# Altium PCB Some-2.PcbDoc
Units mil, origin at the board's own origin, x right, y up, seen from the top; angles counter-clockwise.
Board outline 1565 x 1360 mil, 2 copper layers (Top Layer, Bottom Layer); 10 components, 8 nets, 43 pads, 0 vias.
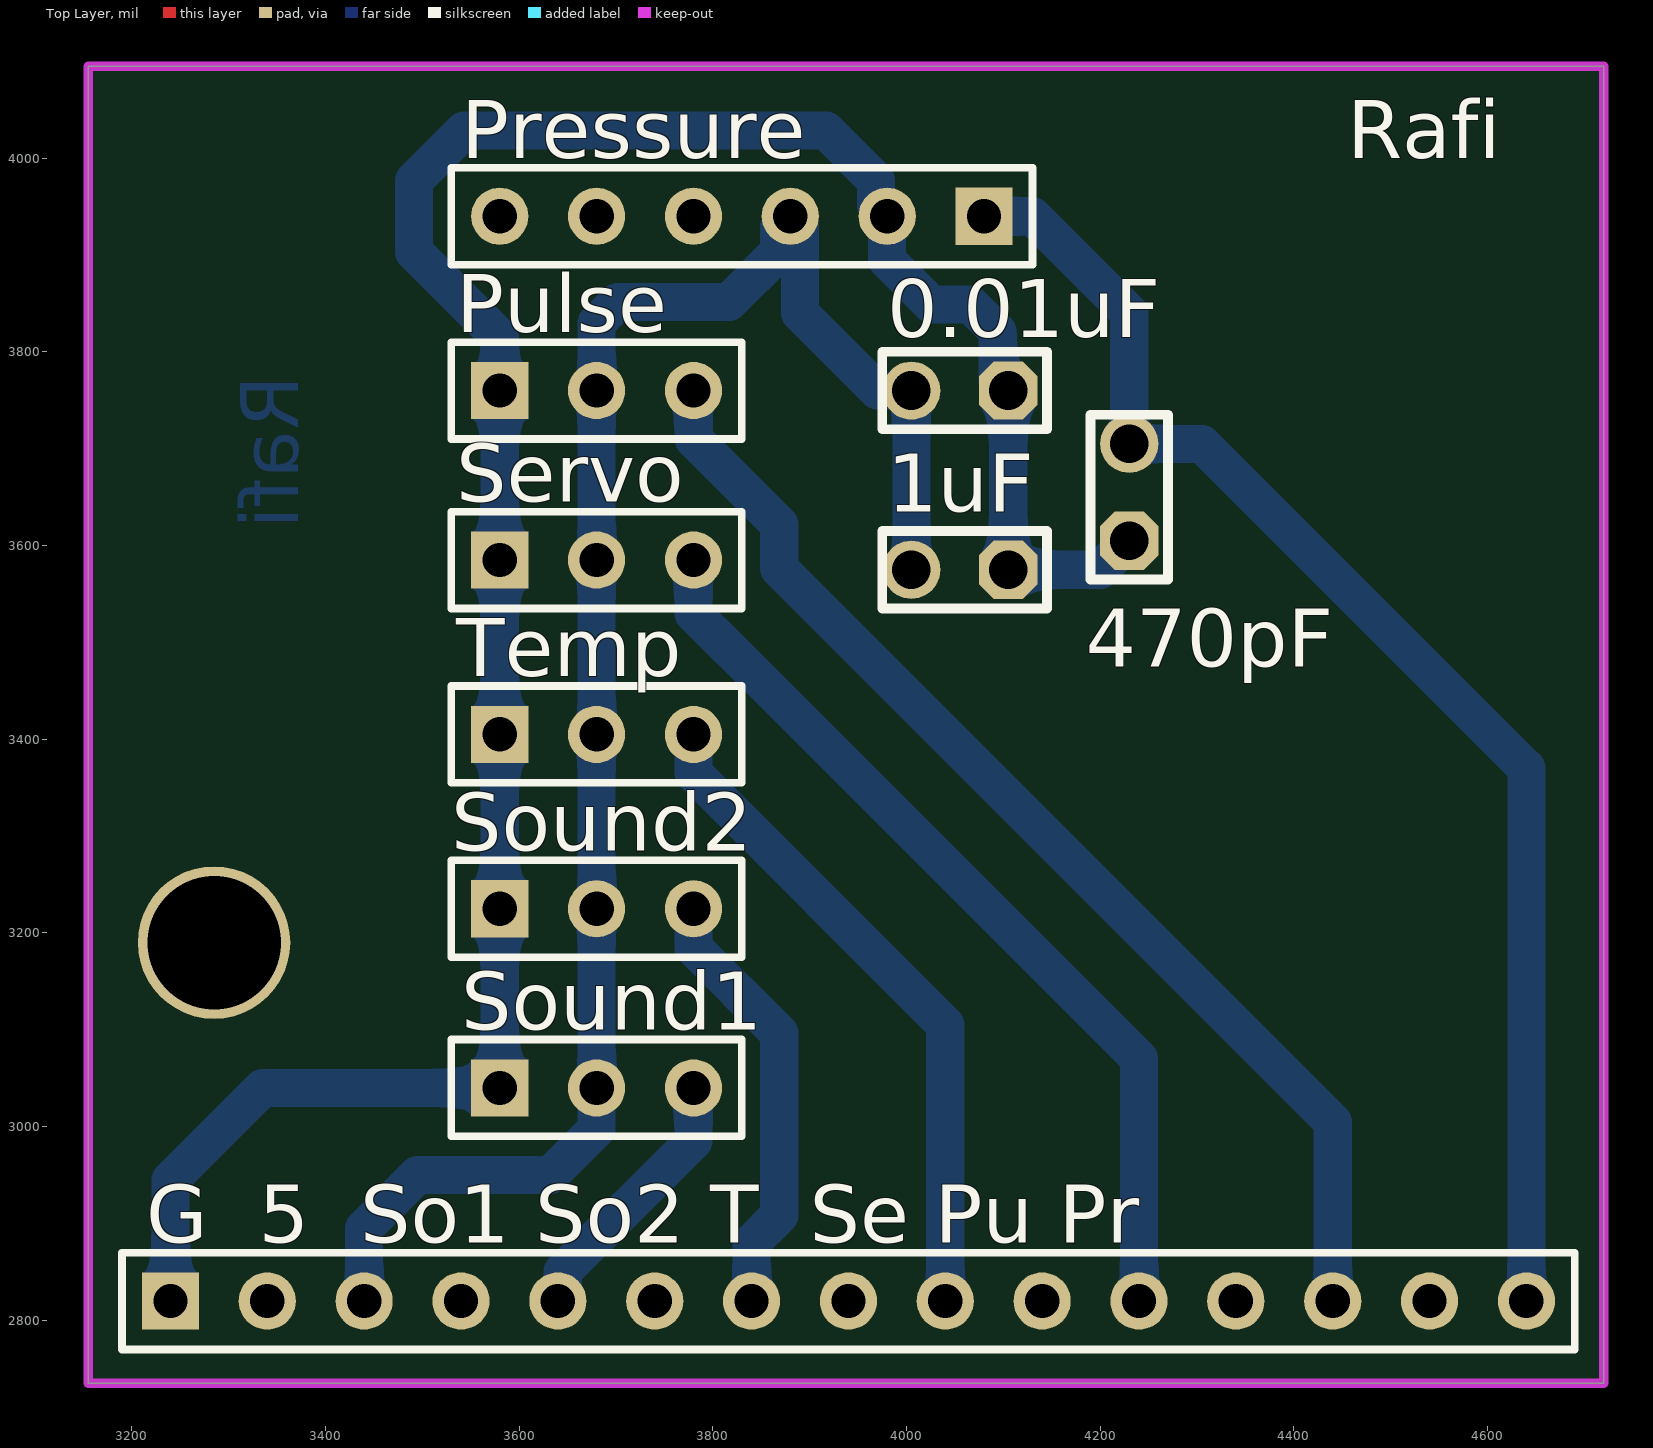
[diagram p0: Top Layer view]
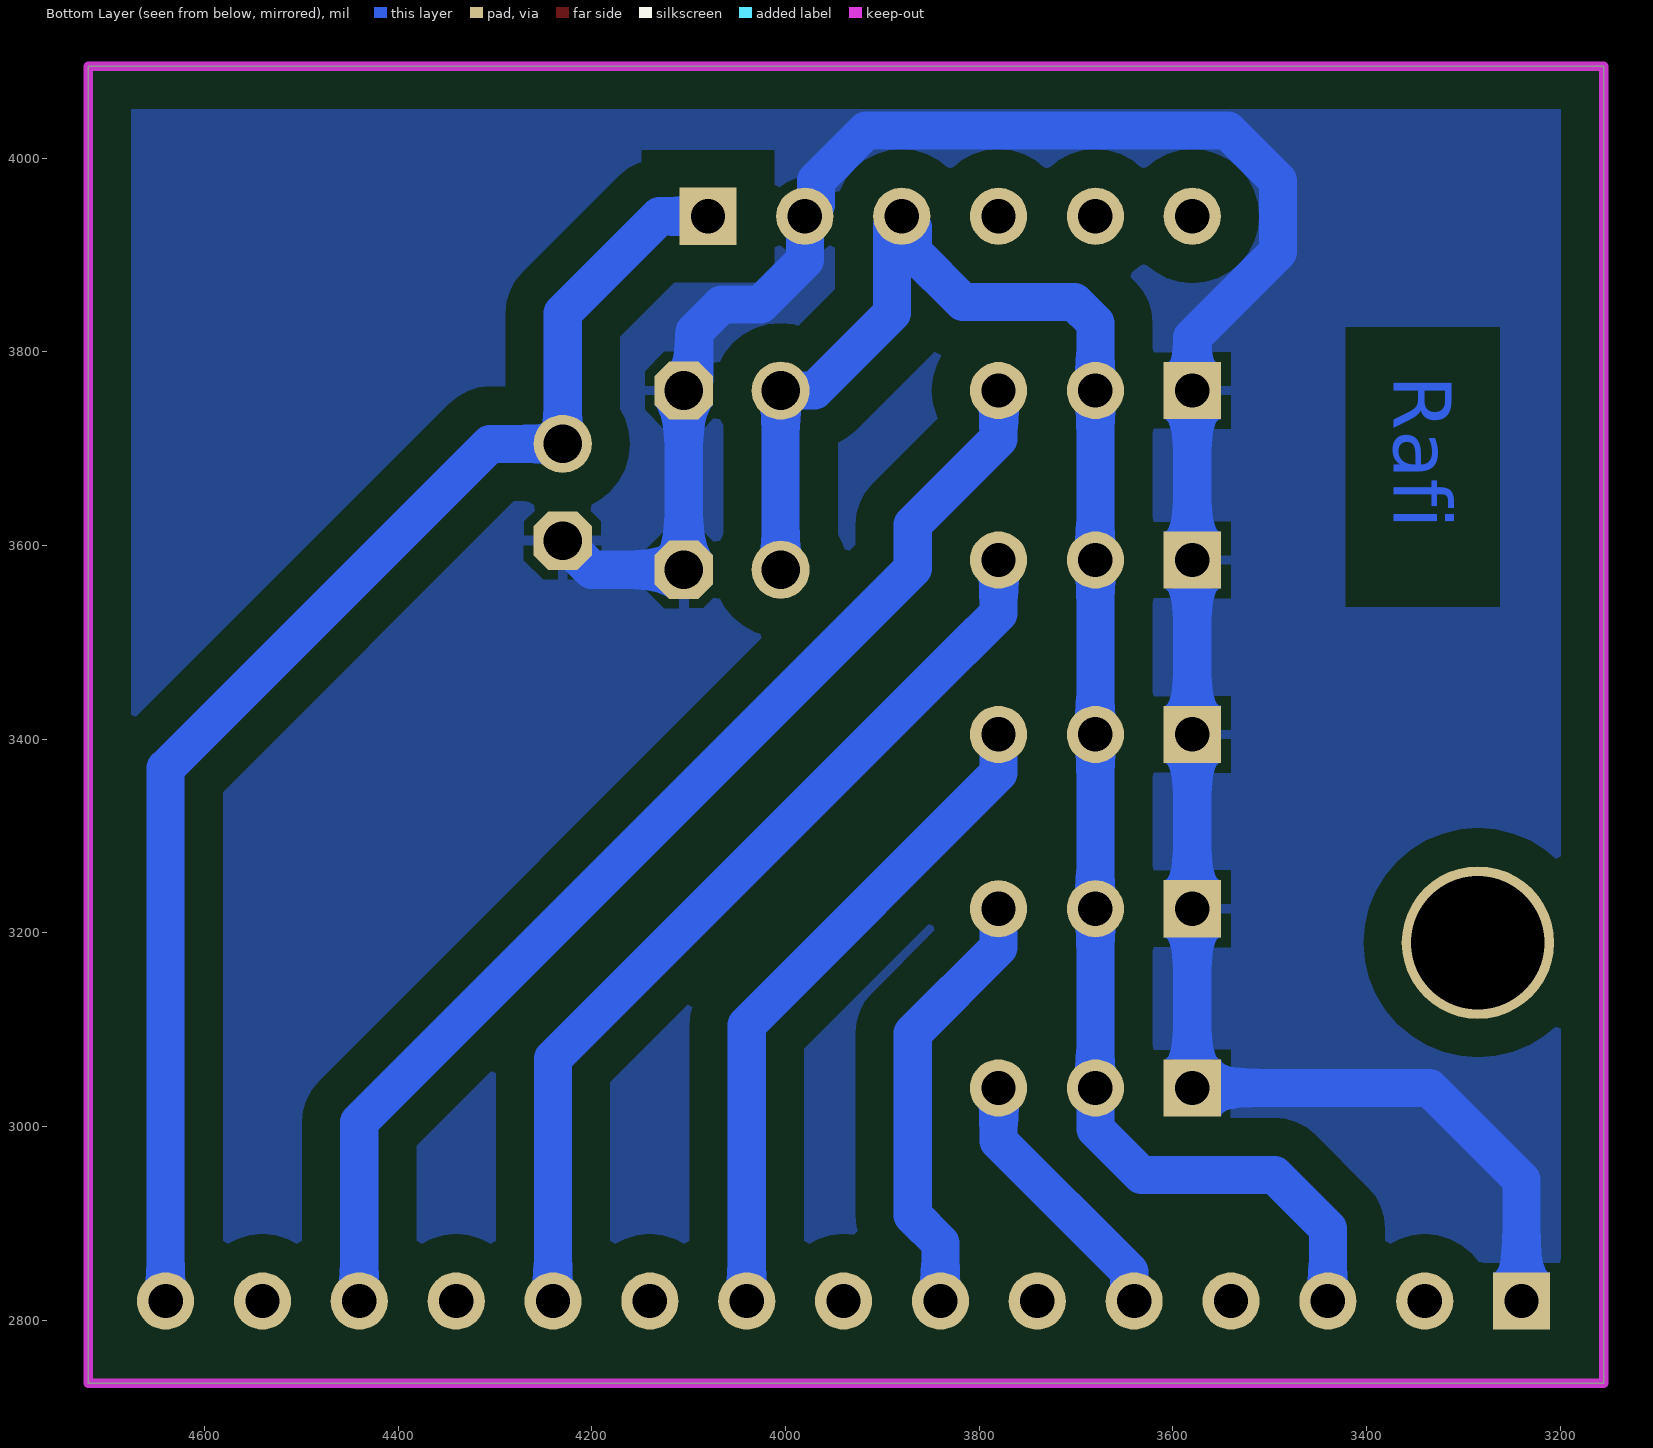
[diagram p1: Bottom Layer view, seen from below]

## Layer stack, top to bottom
Top Solder: solder mask 0.4, Solder Resist, Dk 3.5
Top Layer: signal copper 1.4
Dielectric 1: dielectric 12.6, FR-4, Dk 4.8
Bottom Layer: signal copper 1.4
Bottom Solder: solder mask 0.4, Solder Resist, Dk 3.5

## Board outline
3155,2735 3155,4095 4720,4095 4720,2735

## Design rules (kind name [scope] priority, off if disabled: settings)
Clearance [All] p1: gap=39.37
PolygonConnect [All] p1: connectstyle=Relief reliefconductorwidth=10 reliefentries=4 polygonreliefangle="90 Angle" airgapwidth=10
RoutingVias [All] p1: holewidth=28 width=50 viastyle="Through Hole" minholewidth=28 minwidth=50 maxholewidth=28 maxwidth=50
SolderMaskExpansion [All] p1: expansion=4
Width [All] p1: maxlimit=39.37 minlimit=39.37 preferedwidth=39.37
30 further rules are at their usual default settings.

## Components (designator, comment, footprint, x,y, rotation, side; value= is the part's Value field where it differs from the comment)
0.01uF "Cap" My_cap100n 4055,3760 r180 top
1uF "Cap" My_cap100n 4055,3575 r180 top
470pF "Cap" My_cap100n 4230,3655 r90 top
"G  5  So1 So2 T  Se Pu Pr" "Header 15" HDR1X15 3240,2820 r0 top (schematic designator P?)
Pressure "Header 6" HDR1X6 4080,3940 r180 top
Pulse "" HDR1X3 3580,3760 r0 top
Servo "" HDR1X3 3580,3585 r0 top
Sound1 "" HDR1X3 3580,3040 r0 top
Sound2 "" HDR1X3 3580,3225 r0 top
Temp "" HDR1X3 3580,3405 r0 top (schematic designator Temperature)

## Footprints (in the part's own frame and the unit in brackets; to place one, negate y for a bottom-side part, rotate by r counter-clockwise, add the part's x,y. Pads: shape width x height; smd on the part's side, far side on the other; paste and mask are expansions set on the pad)
HDR1X3 [mm] "Connector; Header; 3 Position"
  rect 1.5x1.5 hole 0.9: 1(0,0)
  round 1.5 hole 0.9: 2(2.54,0) 3(5.08,0)
  silkscreen extent -1.27,-1.27 6.35,1.27
HDR1X6 [mm] "Connector; Header; 6 Position"
  rect 1.5x1.5 hole 0.9: 1(0,0)
  round 1.5 hole 0.9: 2(2.54,0) 3(5.08,0) 4(7.62,0) 5(10.16,0) 6(12.7,0)
  silkscreen extent -1.27,-1.27 13.97,1.27
HDR1X15 [mm] "Connector; Header; 15 Position"
  rect 1.5x1.5 hole 0.9: 1(0,0)
  round 1.5 hole 0.9: 2(2.54,0) 3(5.08,0) 4(7.62,0) 5(10.16,0) 6(12.7,0) 7(15.24,0) 8(17.78,0) 9(20.32,0) 10(22.86,0) 11(25.4,0) 12(27.94,0) 13(30.48,0) 14(33.02,0) 15(35.56,0)
  silkscreen extent -1.27,-1.27 36.83,1.27
My_cap100n [mil]
  oct 60x60 hole 40: 1(-50,0)
  round 60 hole 40: 2(50,0)
  silkscreen extent -90,-40 80,40

## Part data
0.01uF 1uF 470pF: library part "Cap ceramic", "CAP-100Nf"
"G  5  So1 So2 T  Se Pu Pr": "Header, 15-Pin"
Pressure: "Header, 6-Pin"
Pulse Servo Sound1 Sound2 Temp: library part "Header 3", "Header, 3-Pin"

## Free pads (board coordinates)
  round 157.48 hole 137.8: 10(3285,3190)

## Nets (pads, with @x,y where several pads share a name; then routed paths per layer and width w, separated by ;. In a path a pad name is that pad's centre, name@x,y a point inside that pad or via, vN(x,y) a via of type N, cw(c..) or ccw(c..) an arc to the next point about the centre after c; other vN are vias at no path point)
+5: 0.01uF.2 1uF.2 "G  5  So1 So2 T  Se Pu Pr.3" Pressure.3 Pulse.2 Servo.2 Sound1.2 Sound2.2 Temp.2 | length 1887.4
  Bottom Layer w39.37: 3440,2820 3440,2895 3495,2950 3632.57,2950 3680,2997.43 Sound1.2 Sound2.2 Temp.2 Servo.2 Pulse.2 3680,3829.6 3701.82,3851.42 3816.69,3851.42 3868.58,3903.31 3868.58,3928.58 Pressure.3 3889.84,3930.16 3889.84,3840.16 3970,3760 0.01uF.2 1uF.2
GND: 0.01uF.1 1uF.1 470pF.1 "G  5  So1 So2 T  Se Pu Pr.1" Pressure.2 Pulse.1 Servo.1 Sound1.1 Sound2.1 Temp.1 | length 2616.9
  Bottom Layer w39.37: 3240,2820 3240,2945 3335,3040 Sound1.1 Sound2.1 Temp.1 Servo.1 Pulse.1 3580,3814.73 3491.42,3903.31 3491.42,3976.69 3543.31,4028.58 3916.69,4028.58 3968.58,3976.69 3968.58,3951.42 Pressure.2 3980,3895 4025.94,3849.06 4065.94,3849.06 4094.06,3820.94 4094.06,3770.94 0.01uF.1 1uF.1 4200,3575 470pF.1
Net470pF_2: 470pF.2 "G  5  So1 So2 T  Se Pu Pr.15" Pressure.1 | length 1425.2
  Bottom Layer w39.37: Pressure.1 4130,3940 4230,3840 470pF.2 4305,3705 4640,3370 4640,2820
NetP?_5: "G  5  So1 So2 T  Se Pu Pr.5" Sound1.3 | length 275.9
  Bottom Layer w39.37: 3645,2820 3645,2850.27 3780,2985.27 Sound1.3
NetP?_7: "G  5  So1 So2 T  Se Pu Pr.7" Sound2.3 | length 453.5
  Bottom Layer w39.37: Sound2.3 3780,3185 3868.58,3096.42 3868.58,2908.58 3840,2880 3840,2820
NetP?_9: "G  5  So1 So2 T  Se Pu Pr.9" Temp.3 | length 692.7
  Bottom Layer w39.37: Temp.3 3780,3365 4040,3105 4040,2820
NetP?_11: "G  5  So1 So2 T  Se Pu Pr.11" Servo.3 | length 955.7
  Bottom Layer w39.37: Servo.3 3780,3530 3816.42,3493.58 3816.69,3493.58 4240,3070.27 4240,2820
NetP?_13: "G  5  So1 So2 T  Se Pu Pr.13" Pulse.3 | length 1213.4
  Bottom Layer w39.37: Pulse.3 3780,3710.27 3868.58,3621.69 3868.58,3576.42 4440,3005 4440,2820
pads on no net: "G  5  So1 So2 T  Se Pu Pr.2" "G  5  So1 So2 T  Se Pu Pr.4" "G  5  So1 So2 T  Se Pu Pr.6" "G  5  So1 So2 T  Se Pu Pr.8" "G  5  So1 So2 T  Se Pu Pr.10" "G  5  So1 So2 T  Se Pu Pr.12" "G  5  So1 So2 T  Se Pu Pr.14" Pressure.4 Pressure.5 Pressure.6

## Polygon pours and split planes (outlines as drawn)
GND on Bottom Layer "Bottom Layer-GND" (solid, pour order 5): 3155,2735 4720,2735 4720,4095 3155,4095 3155,2735

## Keep-outs
Keep-Out Layer:
  the board outline again, w10

## Other copper
Bottom Layer:
  text "Rafi" at 3372,3776 h60 r90

## Silkscreen, mask and mechanical layers (free items; w line width, h text height)
Top Overlay:
  text "Rafi" at 4455,4000 h60